# Altium PCB PCB1.PcbDoc (part 2 of 2)
Units mil, origin at the board's own origin, x right, y up, seen from the top; angles counter-clockwise.
Board outline 6299.21 x 3937.01 mil, 2 copper layers (Top Layer, Bottom Layer); 110 components, 74 nets, 374 pads, 104 vias.
Unrouted connection lines stored in the file: 41.
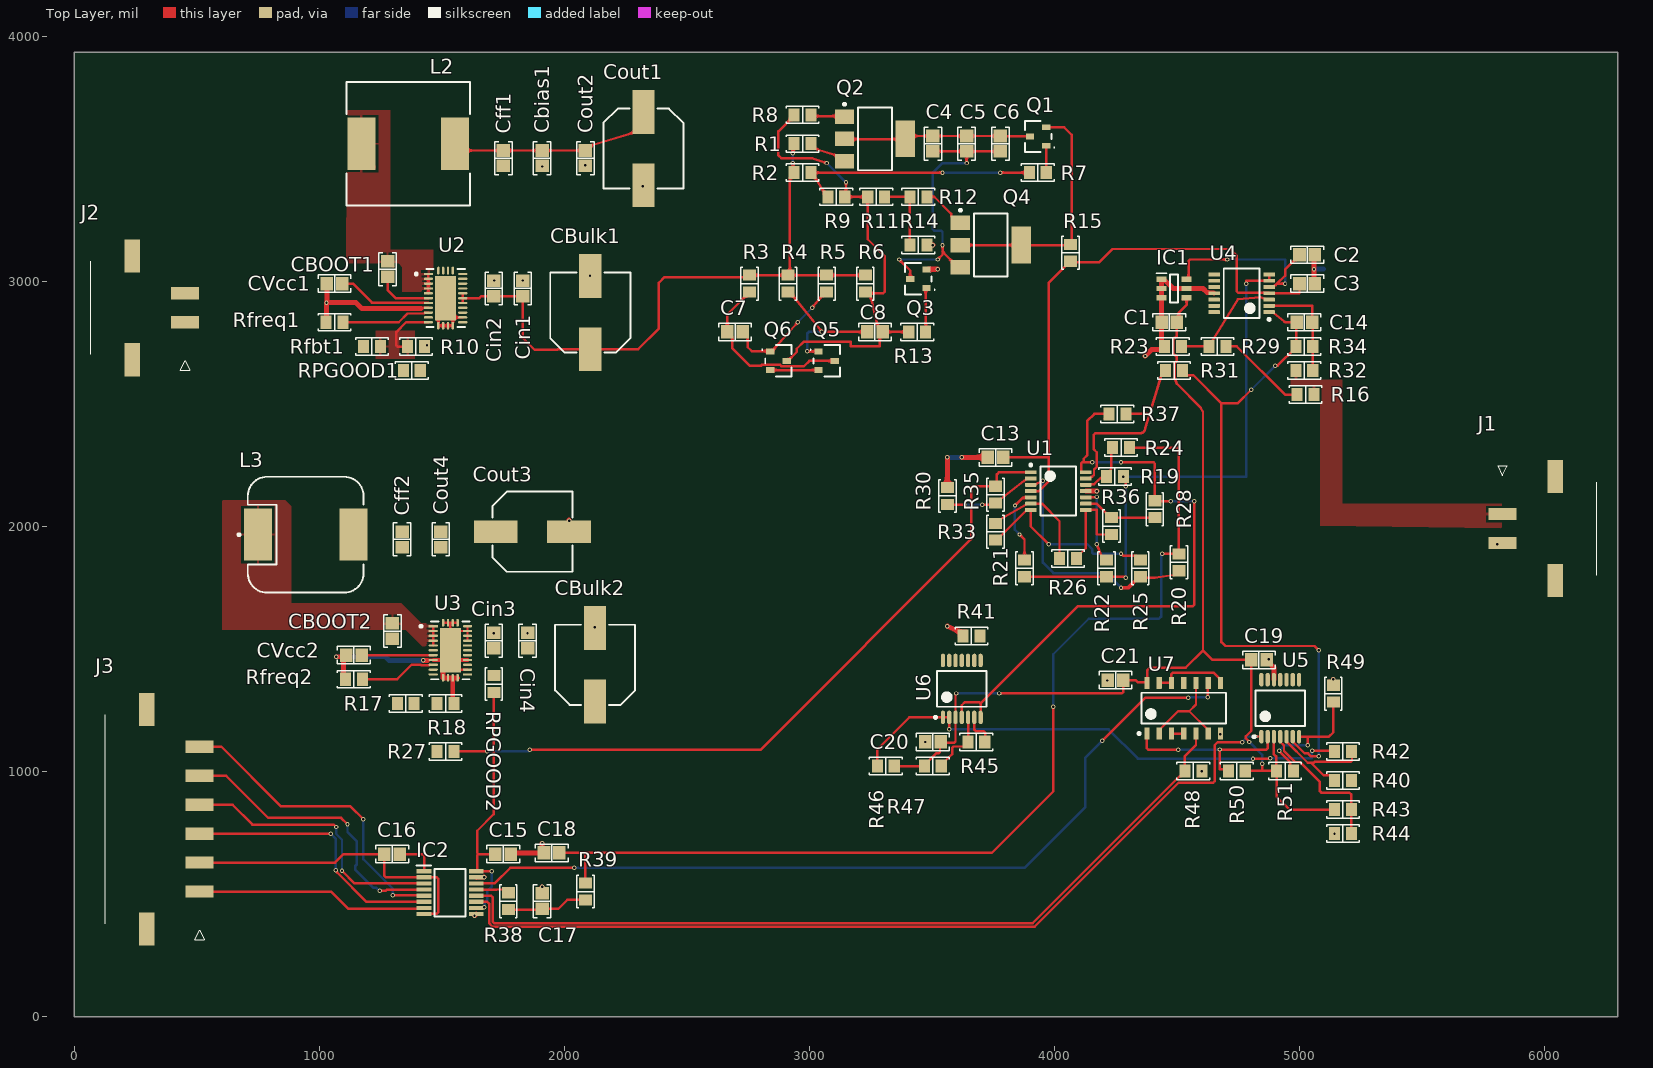
[diagram p0: Top Layer view]

## Via types
v1: diameter 18, hole 10, Top Layer to Bottom Layer, 102 vias
v2: diameter 16, hole 8, Top Layer to Bottom Layer, 2 vias

## Nets (pads, with @x,y where several pads share a name; then routed paths per layer and width w, separated by ;. In a path a pad name is that pad's centre, name@x,y a point inside that pad or via, vN(x,y) a via of type N, cw(c..) or ccw(c..) an arc to the next point about the centre after c; other vN are vias at no path point) (continued)
NetR30_1: (continued)
  Top Layer w10: R30.1 3564.53,2090 v1(3635,2090) ; v1(3705,2090) 3753.39,2090 R35.2 3781.42,2114.09 3874.59,2186.55 cw(c3881.89,2177.17) 3874.96,2186.82 3884.92,2193.98 U1.2
  Bottom Layer w10: v1(3635,2090) v1(3705,2090)
NetR31_1: R31.1 R37.2 U1.13 | length 786.6
  Top Layer w10: U1.13 4143.7,2196.85 4151.5,2204.65 4154.53,2204.65 4161.5,2211.61 4161.5,2233.27 4172.46,2244.24 4172.46,2304.38 4160.95,2315.89 4160.95,2376.03 4166.81,2381.89 4350.39,2381.89 ccw(c4350.39,2401.57) 4370.04,2400.32 cw(c4380.02,2399.69) 4370.46,2402.62 4388.72,2462.04 ; R37.2 4387.31,2460.63 4388.72,2462.04 ; R31.1 4436.1,2616.22 4388.72,2462.04
NetR40_1: R40.1 RPGOOD2.1 U3.16
NetR40_2: R40.2 R42.2 U5.5 | length 491.7
  Top Layer w10: U5.5 4946.85,1124.03 5033.5,1037.38 5047.4,1037.38 ; R40.2 5142.72,968.5 5125.08,986.14 5098.64,986.14 5047.4,1037.38 ; R42.2 5214.17,1080.12 5214.17,1046.41 5208.32,1040.55 5061.8,1040.55 5058.62,1037.38 5047.4,1037.38
NetR41_1: R41.1 R45.2 U6.6 | length 138.4
  Top Layer w10: U6.6 3673.23,1172.39 3679.09,1166.54 3711.46,1166.54 3717.32,1160.68 3717.32,1123.82 R45.2
NetR42_1: R42.1 R46.2 U6.1 U6.2 | length 2117.8
  Top Layer w10: R46.2 3277.56,1092.52 3407.48,1222.44 U6.1 U6.2 v1(3570.87,1173.62) ; v1(4810.24,1053.94) 4879.13,1053.94 v1(4880.31,1055.12) ; v1(5051.18,1085.83) 5139.57,1085.83 R42.1
  Bottom Layer w10: v1(3570.87,1173.62) 4221.26,1173.62 4340.55,1054.33 4809.84,1054.33 v1(4810.24,1053.94) ; v1(4880.31,1055.12) 5049.61,1055.12 5049.61,1084.25 v1(5051.18,1085.83)
NetR43_2: R43.2 R44.2 U5.4 | length 594.7
  Top Layer w10: U5.4 4921.26,1122.91 4936.64,1107.53 4936.64,1085.76 4981.97,1040.43 5002.14,1040.43 5083.07,959.5 5083.07,921.61 5088.93,915.75 5203.16,915.75 5211.61,907.29 R43.2 R44.2
NetR45_1: R45.1 R47.2 U6.5 | length 267.8
  Top Layer w10: R47.2 3538.39,1027.56 3582.68,1071.85 3582.68,1097.72 3588.53,1103.58 3629.02,1103.58 3646.65,1121.22 R45.1 3647.64,1123.03 U6.5
NetR49_1: R49.1 R51.2 U5.7 | length 539.8
  Top Layer w10: v1(4917.72,1087.01) 4916,1087.01 4916,1085.3 4961.65,1039.65 4961.65,1017.68 R51.2 ; U5.7 5033.86,1143.7 ; v1(5034.25,1109.45) 5034.25,1143.31 5033.86,1143.7 ; R49.1 5137.8,1161.42 5120.08,1143.7 5033.86,1143.7
  Bottom Layer w10: v1(4917.72,1087.01) 4940.16,1109.45 v1(5034.25,1109.45)
NetR50_2: R50.2 U5.2 U7.1 | length 754.8
  Top Layer w10: U7.1 4377.56,1096.02 4383.42,1090.16 v1(4505.12,1090.16) ; R50.2@4727.28,1025.51 4709.65,1007.87 R50.2 4703.39,1010.19 4674.41,1010.19 v1(4674.41,1091.34) 4675.92,1089.83 4864.22,1089.83 4870.08,1095.68 U5.2
  Bottom Layer w10: v1(4505.12,1090.16) 4505.71,1090.75 4673.82,1090.75 v1(4674.41,1091.34)
NetRfreq1_2: Rfreq1.2 U2.9 | length 364.7
  Top Layer w9.45: Rfreq1.2 1324.65,2834.65 1360.35,2870.35 1428.01,2870.35 1431.67,2874.02 U2.9
NetRfreq2_2: Rfreq2.2 U3.9 | length 301.4
  Top Layer w10: Rfreq2.2 1317.95,1377.95 1377.01,1437.01 1414.82,1437.01 1416.75,1435.08 1449.91,1435.08 U3.9@1451.61,1436.78
NetRPGOOD1_1: RPGOOD1.1 U2.16
NetU3_18: U3.18 U7.11
NetU7_2: U7.2 U7.6 U7.10 | length 418.5
  Top Layer w10: U7.2 4427.56,1170.28 4504.92,1247.64 4550.2,1247.64 ; U7.10 4577.56,1275 4550.2,1247.64 ; U7.6 4627.56,1170.28 4550.2,1247.64
NetU7_3: U7.3 U7.4 | length 50
  Top Layer w10: U7.3 U7.4
NetU7_8: U7.8 U7.12 U7.13 | length 313.8
  Top Layer w10: U7.13 U7.12 4477.56,1399.14 4483.42,1405 4649.53,1405 4677.56,1376.97 U7.8
Output: J1.1 R16.2 R32.2
"PGOOD (OUT)": IC2.6 J3.3 | length 1108.3
  Top Layer w10: J3.3 v1(1047.24,748.03) ; v1(1067.32,598.03) 1067.32,595.87 1074.39,588.8 1074.39,588.62 1193.13,469.88 IC2.6
  Bottom Layer w10: v1(1047.24,748.03) 1067.32,727.95 v1(1067.32,598.03)
"Reset (IN)": IC2.5 J3.6 | length 1278.4
  Top Layer w10: J3.6 601.18,1102.36 844.49,859.06 1127.95,859.06 v1(1179.92,807.09) ; v1(1300.39,496.85) 1301.4,495.84 1426.37,495.84 IC2.5
  Bottom Layer w10: v1(1179.92,807.09) 1179.92,644.22 1300.39,523.75 v1(1300.39,496.85)
Setpoint: IC2.13 R38.1 | length 136.4
  Top Layer w10: IC2.13 1722.63,519.88 1722.83,520.08 1758.46,520.08 R38.1
"Setpoint (IN)": IC2.4 J3.5 | length 1206.8
  Top Layer w10: J3.5 620.08,984.25 792.13,812.2 1089.42,812.2 1115.4,786.22 v1(1115.75,786.22) ; v1(1247.73,514.41) 1248.2,514.88 1271.73,514.88 1276.73,519.88 IC2.4
  Bottom Layer w10: v1(1115.75,786.22) 1115.75,755.12 1152.76,718.11 1152.76,621.57 1147.95,616.77 1147.95,600.27 1152.76,595.46 1152.76,594.88 1219.98,527.66 1232.31,527.66 1245.57,514.41 v1(1247.73,514.41)
Vcc1: C16.1 IC2.1 IC2.7 J3.1 | length 1111.2
  Top Layer w10: J3.1 1048.43,511.81 1117.72,442.52 1425.06,442.52 IC2.7 ; C16.1 1422.49,664.84 1428.35,658.98 1428.35,595.81 IC2.1
Vcc2: C1.1 C15.2 C19.1 C20.2 C21.2 Cbias1.2 Cff1.2 Cout1.1 Cout2.2 IC1.4 IC2.10 IC2.16 L2.2 R43.1 R46.1 R47.1 R50.1 R51.1 Rfbt1.2 RPGOOD1.2 RPGOOD2.2 U5.3 U6.3 U7.14 | length 6471.5
  Top Layer w10: L2.2 ccw(c1621.65,3629.53) 1621.65,3535.43 Cff1.2 Cbias1.2 Cout2.2 2109.17,3556.02 2282.56,3608.35 Cout1.1 ; IC2.10 1642.34,446.34 1672.92,446.34 v1(1674.43,447.84) ; v1(1704.72,594.09) 1704.35,594.47 1641.3,594.47 1640.93,594.84 1644.49,598.4 1644.49,658.98 1650.35,664.84 ; RPGOOD2.2 1712.6,827.6 1645,760 1645,670.18 1650.35,664.84 ; C15.2 1650.35,664.84 ; R46.1 R47.1 3469.49,1027.56 3517.52,1075.59 3527.21,1075.59 3533.07,1081.45 3533.07,1119.69 C20.2 3538.98,1118.5 3590.6,1118.5 3596.46,1124.36 U6.3 3596.46,1314.29 3600,1317.84 v1(3600,1320) ; v1(3775,1320) 4274.85,1320 4280.71,1325.86 C21.2 4331.1,1374.8 4339.37,1366.54 4374.21,1366.54 U7.14 4377.95,1363.58 4377.95,1414.17 4389.37,1425.59 4535.83,1425.59 4606.3,1496.06 ; IC1.4@4523.7,2929.21 IC1.4 4539.37,2905.51 4507.87,2874.02 4507.87,2842.52 C1.1 4500,2782.01 cw(c4490,2782.06) 4492.59,2772.4 ccw(c4495.08,2762.8) 4485.16,2762.8 4485.16,2709.65 ccw(c4495.08,2709.65) 4492.51,2700.06 cw(c4490,2690.38) 4500,2690.38 4500,2681.55 cw(c4490,2681.6) 4495.05,2672.97 ccw(c4500,2664.37) 4490.08,2664.37 4490.08,2611.22 ccw(c4500,2611.22) 4490.67,2607.84 4499.4,2583.72 4596.64,2486.49 4606.3,2470.42 4606.3,1496.06 ; R50.1 4842.52,1003.94 ; v1(4795.67,1122.05) 4795.67,1122.82 4781.5,1136.99 4781.5,1145.28 4803.15,1166.93 C19.1 4645.67,1456.69 4606.3,1496.06 ; v1(4848.03,1032.68) 4847.26,1031.91 4847.26,1008.68 4842.52,1003.94 ; U5.3 4895.67,1071.65 4904.33,1062.99 4904.33,1006.1 R51.1 ; R43.1 4958.66,846.46 4906.5,898.62 R51.1 ; 4842.52,1003.94 R51.1
  Bottom Layer w10: v1(1674.43,447.84) 1675.96,449.37 1675.96,467.76 1685.04,476.84 1685.04,512.99 1704.72,532.68 v1(1704.72,594.09) ; v1(3600,1320) v1(3775,1320) ; v1(4795.67,1122.05) 4848.03,1069.68 v1(4848.03,1032.68)
Vin: CBulk1.1 CBulk2.1 Cin1.1 Cin2.1 Cin3.1 Cin4.1 J2.2 R1.1 R2.1 R3.2 R4.2 R5.2 R6.2 U2.18 U2.20 U2.21 U2.22 U3.20 U3.21 U3.22 | length 2656.3
  Top Layer w10: U2.20 U2.21 ; U2.22 U2.21 ; v1(2933.07,3484.25) 2933.07,3466.46 R2.1 2920.35,3423.31 2920.35,3044.21 R4.2 ; v1(2933.07,3523.62) 2933.07,3541.42 R1.1 ; R6.2 R5.2 3049.29,3026.57 R4.2 ; U2.21 1653.54,2933.07 1661.02,2940.55 1712.2,2940.55 Cin2.1 Cin1.1 1830.71,2770.47 1878.93,2722.25 1971.4,2722.25 1973.55,2724.41 CBulk1.1 2301.57,2724.41 2386.22,2809.06 2386.22,2995.67 2409.45,3018.9 2748.23,3018.9 R3.2 2777.48,3026.57 R4.2
  Bottom Layer w10: v1(2933.07,3484.25) v1(2933.07,3523.62)
VOPA: C3.2 C13.2 R15.1 U1.4 U4.4 | length 2371.9
  Top Layer w10: C13.2 3976.38,2283.46 ; U1.4 3937.01,2145.67 3976.38,2185.04 3976.38,2283.46 ; C3.2 5000,2952.76 U4.4 4874.57,2954.17 4749.95,2954.17 4744.09,2960.02 4744.09,3107 4717.63,3133.46 4237.01,3133.46 4182.28,3078.74 4069.88,3078.74 R15.1 4061.02,3083.66 4043.39,3066.02 4043.39,3062.09 3976.38,2995.08 3976.38,2283.46
Vref: R19.2 R21.2 R22.2 U4.6 U4.7 | length 2260.8
  Top Layer w10: R21.2 R22.2 4291.34,1796.26 v1(4291.34,1791.34) ; v1(4281.5,2204.72) 4291.34,2204.72 v1(4291.34,2165.35) ; v1(4783.46,2992.13) 4783.46,3003.94 U4.6 U4.7
  Bottom Layer w10: v1(4281.5,2204.72) 4783.46,2204.72 v1(4783.46,2992.13) ; v1(4291.34,1791.34) v1(4291.34,2165.35)
Vsense_b: C14.2 R31.2 R34.2 U4.1 U5.6 | length 2811.9
  Top Layer w10: R31.2 4522.64,2635.75 4540.28,2618.11 4566.93,2618.11 4681.5,2503.54 ; v1(4803.15,2559.06) 4747.64,2503.54 4681.5,2503.54 ; U4.1 4894.61,2873.11 4938.17,2836.95 ; v1(4901.57,2657.48) 4910.43,2657.48 4985.24,2732.28 R34.2 4985.88,2757.8 4985.88,2812.09 C14.2 4967.6,2834.65 4944.55,2834.65 cw(c4944.55,2844.65) 4938.19,2836.93 ; U5.6 4972.44,1124.03 5021.25,1075.22 5035.03,1075.22 5047.26,1062.99 v1(5078.74,1062.99) ; v1(5078.74,1496.06) 5061.07,1513.73 4697.64,1513.73 4681.5,1529.87 4681.5,2503.54
  Bottom Layer w10: v1(4803.15,2559.06) v1(4901.57,2657.48) ; v1(5078.74,1062.99) v1(5078.74,1496.06)
Vsp: C18.2 R20.2 R24.2 R39.2 | length 4269.8
  Top Layer w10: C18.2 2080.76,669.29 ; R39.2 2086.61,663.43 2080.76,669.29 ; v1(3995,1265) 3995,920 3744.29,669.29 2080.76,669.29 ; R24.2 4507.87,2322.83 R20.2 4507.64,1890 v1(4440,1890)
  Bottom Layer w10: v1(3995,1265) 3995,1480 4140,1625 4425,1625 4425.86,1624.14 4435,1633.28 4435,1885 v1(4440,1890)
pads on no net: J1.3 J1.4 J2.3 J2.4 J3.7 J3.8 U2.10 U3.10 U4.8 U4.9 U4.10 U4.12 U4.13 U4.14 U5.8 U5.9 U5.10 U5.11 U5.13 U5.14 U6.8 U6.9 U6.10 U6.11 U6.13 U6.14

## Polygon pours and split planes (outlines as drawn)
NetCff1_1 on Top Layer "NETCFF1_1_L01_P021" (solid, pour order 21): 1230,2800 1390,2800 1390,2685 1230,2685
NetCBOOT1_1 on Top Layer "NETCBOOT1_1_L01_P019" (solid, pour order 19): 1115,3700 1290,3700 1290,3130 1465,3130 1465,2950 1455,2960 1340,2960 1340,3060 1325,3075 1110,3075
Output on Top Layer "OUTPUT_L01_P018" (solid, pour order 18): 5085,2600 5175,2600 5175,2095 5825,2095 5825,1995 5085,2005 5085,2510
Output on Top Layer "OUTPUT_L01_P017" (solid, pour order 17): 4965,2670 5015,2670 5015,2600 5085,2600 5085,2510 5040,2510 5040,2575 4965,2575
NetCBOOT2_1 on Top Layer "NETCBOOT2_1_L01_P015" (solid, pour order 15): 606.3,2108.66 861.42,2108.66 885.43,2084.65 885.43,1687.4 1335.83,1687.4 1416.93,1606.3 1485.83,1606.3 1485.83,1516.54 1481.1,1511.81 1421.65,1511.81 1351.57,1581.89 1350.39,1580.71 605.51,1580.71 605.51,2104.72
GND on Bottom Layer "GND_L02_P003" (solid, pour order 3): 98.43,3838.58 6200.79,3858.27 6200.79,98.43 98.43,118.11